# Altium PCB SB7043.PcbDoc (part 1 of 2)
Units mm, origin at the board's own origin, x right, y up, seen from the top; angles counter-clockwise.
Board outline 70 x 43 mm, 4 copper layers (Top Layer, GND, Signal Layer 1, Bottom Layer), stack 1.534 mm thick; 111 components, 152 nets, 554 pads, 320 vias.
Unrouted connection lines stored in the file: 5.
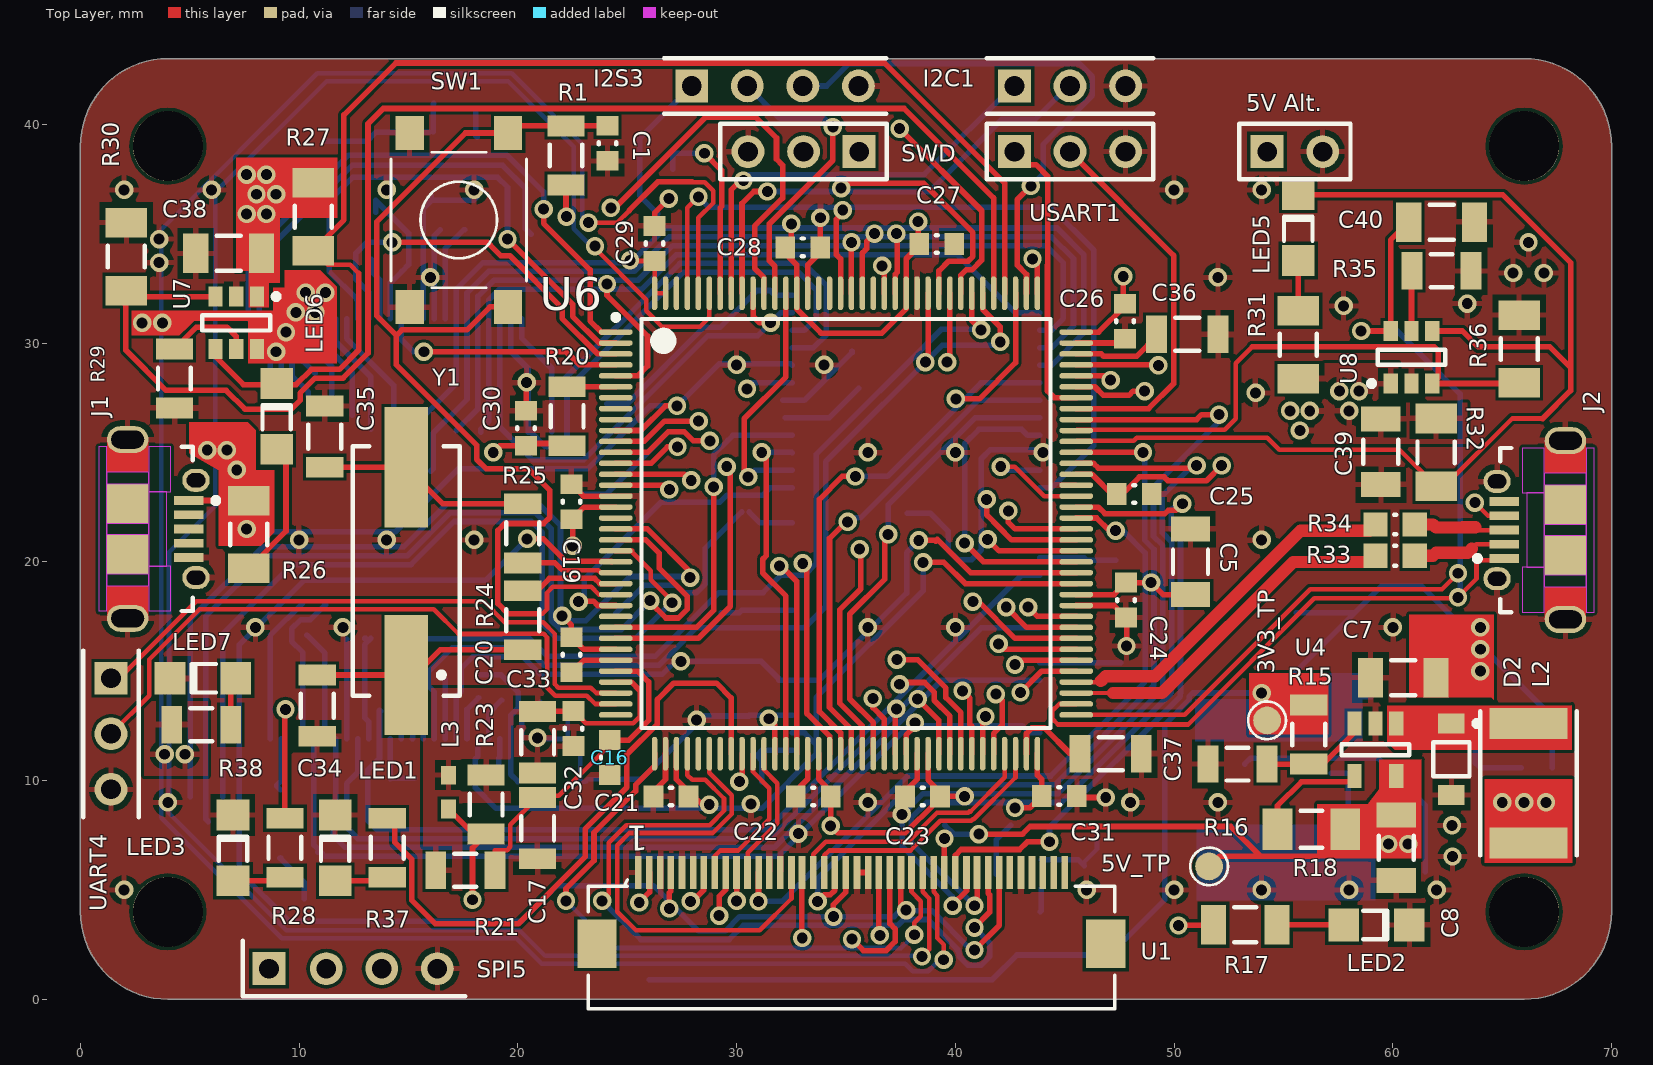
[diagram p0: Top Layer view]
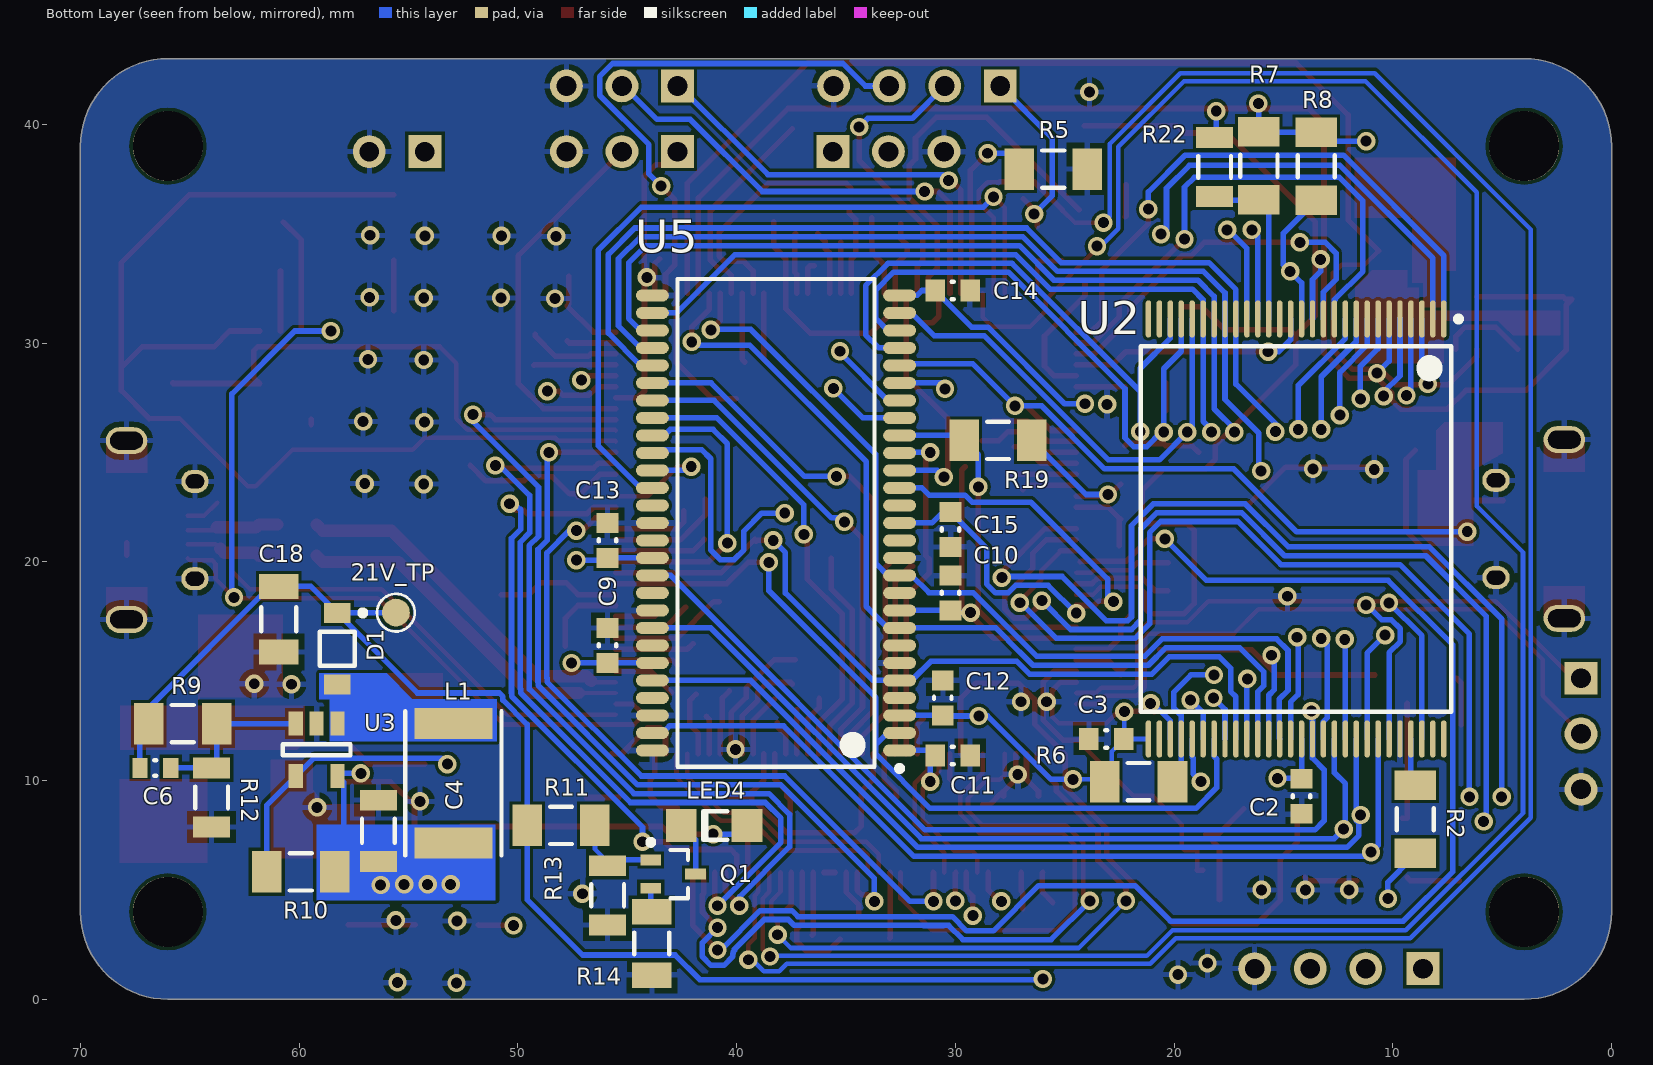
[diagram p1: Bottom Layer view, seen from below]
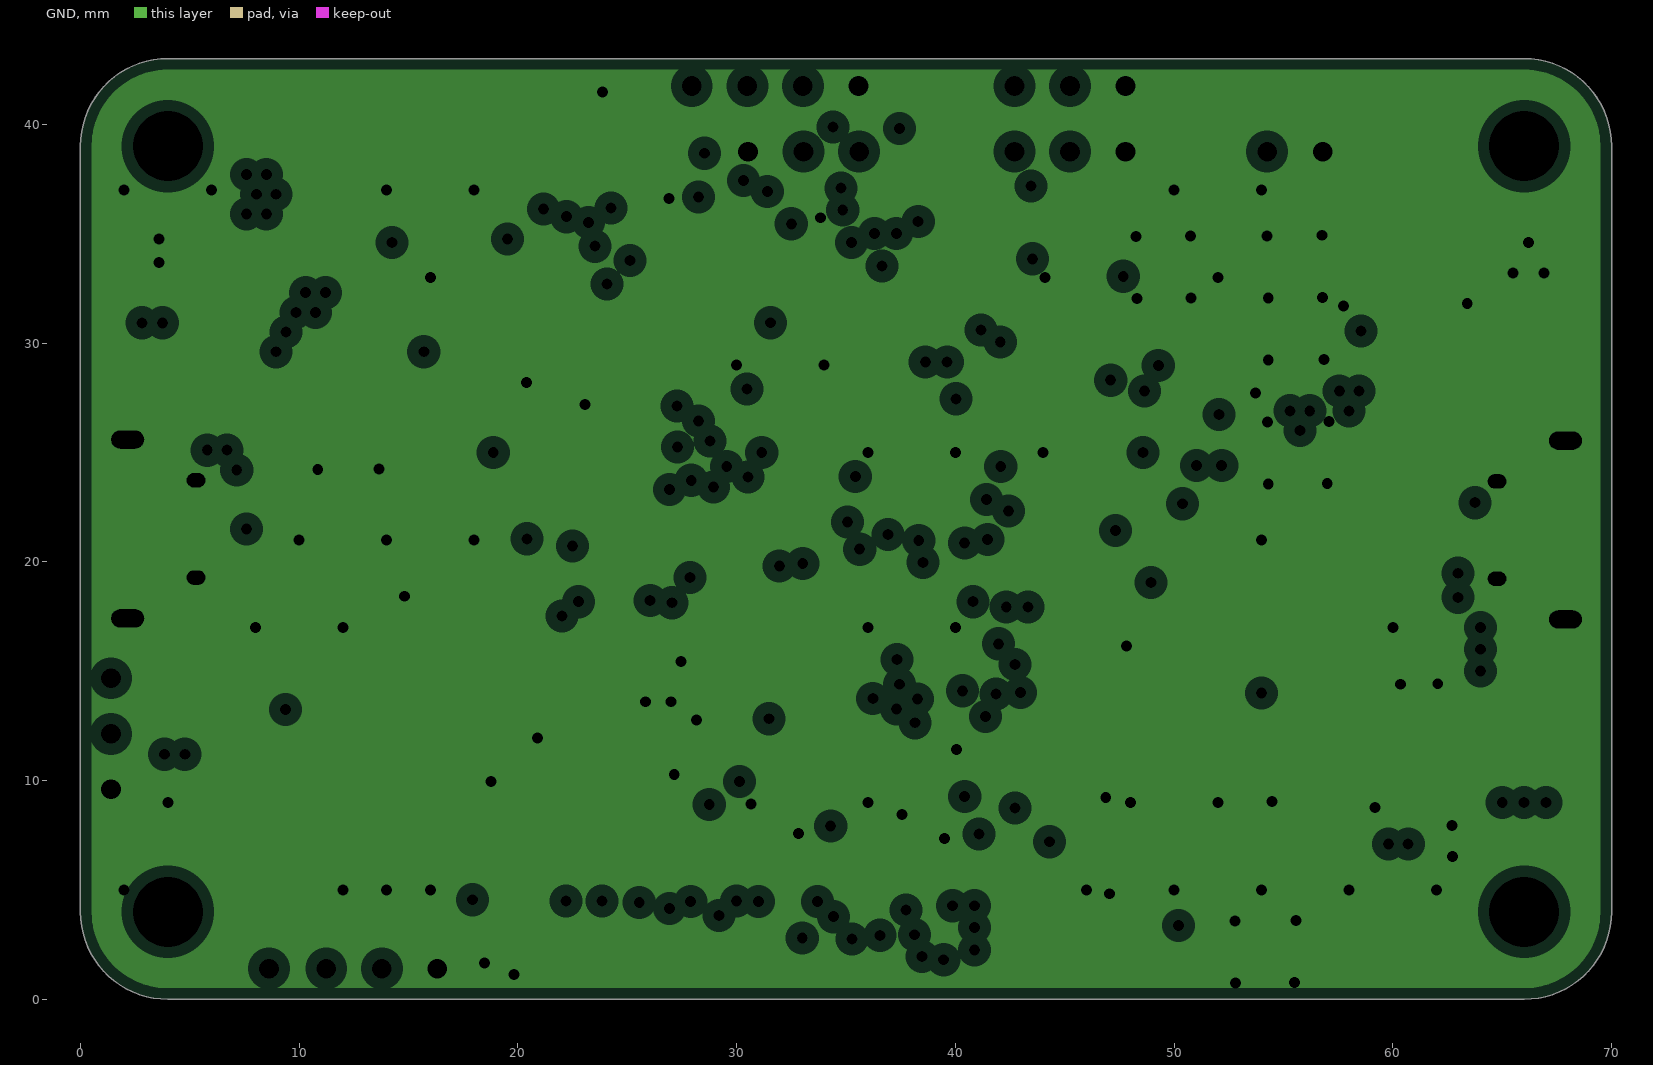
[diagram p2: GND, clearances drawn from the general rule]
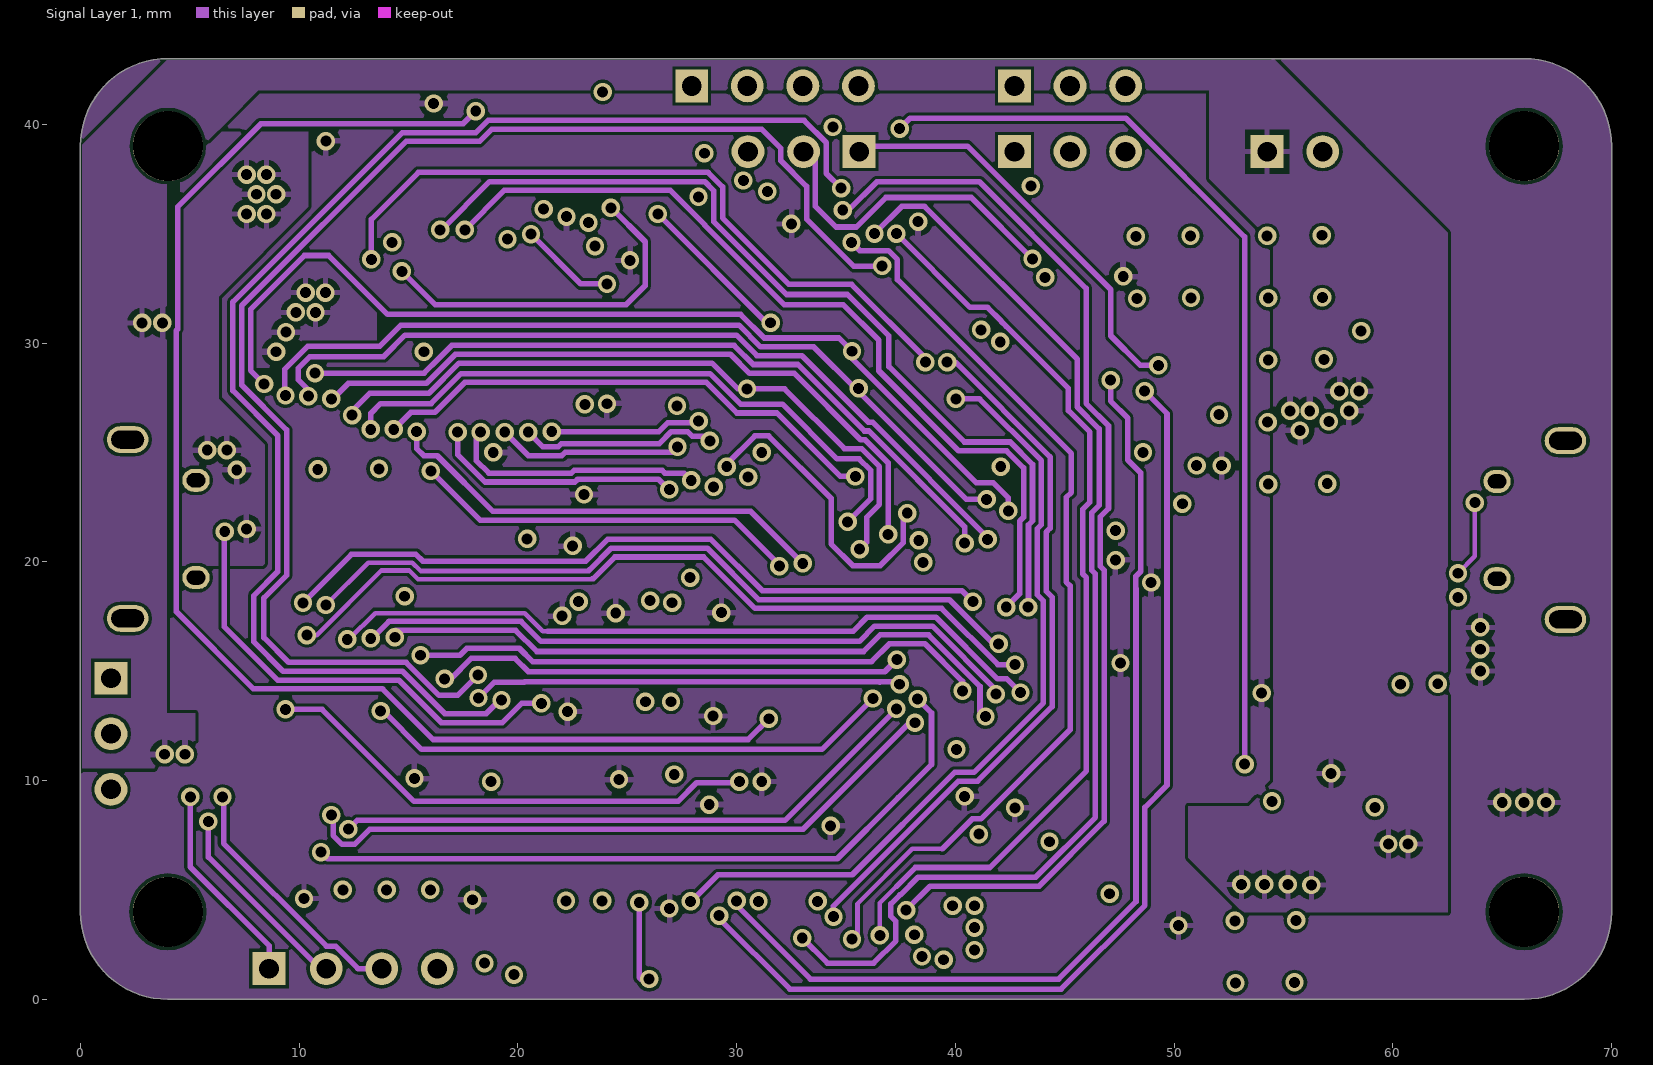
[diagram p3: Signal Layer 1]

## Layer stack, top to bottom
Top Solder: solder mask 0.0102, Solder Resist, Dk 3.5
Top Layer: signal copper 0.017
Dielectric1: prepreg 0.36, Dk 4.2
GND: plane copper 0.035
Dielectric 2: core 0.71, FR4, Dk 4.2
Signal Layer 1: signal copper 0.035
Dielectric 3: prepreg 0.36, Dk 4.2
Bottom Layer: signal copper 0.017
Bottom Solder: solder mask 0.0102, Solder Resist, Dk 3.5

## Board outline
4,0 cw(c4,4) 0,4 0,39 cw(c4,39) 4,43 66,43 cw(c66,39) 70,39 70,4 cw(c66,4) 66,0

## Design rules (kind name [scope] priority, off if disabled: settings)
Clearance [All] p1: gap=0.15
DiffPairsRouting [All] p1: maxlimit=6.863 minlimit=0.21 mostfreqgap=0.588 toplayer_minwidth=0.201 toplayer_maxwidth=0.667 toplayer_prefwidth=0.56 midlayer1_minwidth=0.201 midlayer1_maxwidth=0.667 midlayer1_prefwidth=0.56 bottomlayer_minwidth=0.201 bottomlayer_maxwidth=0.667 bottomlayer_prefwidth=0.56 maxuncoupledlength=12.7
MatchedLengths DiffPair_USBMatchedLengths [InDifferentialPair ('OTG')] p1: tolerance=25.4 checknetsindiffpair=TRUE checkdiffpairvsdiffpair=TRUE checkothers=TRUE
MaxMinImpedance [InNetClass('A[0..23]')] p1: minimum=40,00 maximum=60,00
MinimumSolderMaskSliver [All] p1: minsoldermaskwidth=0.21
PlaneClearance [All] p1: clearance=0.508
PlaneConnect [All] p1: planeconnectstyle=Relief reliefexpansion=0.508 reliefentries=4 reliefconductorwidth=0.254 reliefairgap=0.254
PolygonConnect [All] p1: connectstyle=Relief reliefconductorwidth=0.254 reliefentries=4 polygonreliefangle="90 Angle" airgapwidth=0.254
RoutingVias [All] p1: holewidth=0.5 width=0.84 viastyle="Through Hole" minholewidth=0.4 minwidth=0.74 maxholewidth=0.5 maxwidth=0.84
SolderMaskExpansion [All] p1: expansion=0.102
Width [All] p1: maxlimit=0.254 minlimit=0.21 preferedwidth=0.254
26 further rules are at their usual default settings.

## Classes and differential pairs
net class R[7..2]: R2 R3 R4 R5 R6 R7
component class IO_Peripherals: "5V Alt." C1 I2C1 I2S3 LED1 LED3 R1 R28 R37 SPI5 SW1 SWD U1 UART4 USART1
component class MCU: C5 C16 C17 C19 C20 C21 C22 C23 C24 C25 C26 C27 C28 C29 C30 C31 C32 C33 C34 C35 C36 C37 L3 R5 R20 R21 R22 R23 R24 R25 U6 Y1
component class NOR: C2 C3 R2 R6 R7 R8 U2
component class Power: 3V3_TP 5V_TP 21V_TP C4 C6 C7 C8 C18 D1 D2 L1 L2 LED2 LED4 Q1 R9 R10 R11 R12 R13 R14 R15 R16 R17 R18 U3 U4
component class RAM: C9 C10 C11 C12 C13 C14 C15 R19 U5
component class USB: C38 C39 C40 J1 J2 LED5 LED6 LED7 R26 R27 R29 R30 R31 R32 R33 R34 R35 R36 R38 U7 U8
net class A[0..23]: A0 A1 A2 A3 A4 A5 A6 A7 A8 A9 A10 A11 A12 A13 A14 A15 A16 A17 A18 A19 A20 A21 A22 A23
net class B[7..2]: B2 B3 B4 B5 B6 B7
net class DQ[0..15]: DQ0 DQ1 DQ2 DQ3 DQ4 DQ5 DQ6 DQ7 DQ8 DQ9 DQ10 DQ11 DQ12 DQ13 DQ14 DQ15
net class G[7..2]: G2 G3 G4 G5 G6 G7
differential pair OTGBIS: +OTGBIS_P -OTGBIS_N
differential pair OTG: +OTG_P -OTG_N

## Components (designator, comment, footprint, x,y, rotation, side; value= is the part's Value field where it differs from the comment)
3V3_TP "TESTPOINT" TP-R60 54.25,12.75 r90 top
"5V Alt." "Header 2" HDR1X2 54.25,38.75 r0 top
5V_TP "TESTPOINT" TP-R60 51.6,6.075 r90 top
21V_TP "TESTPOINT" TP-R60 55.575,17.675 r90 bottom
C1 "100nF" CAPC0603(1608)100_N 24.1,39.125 r90 top
C2 "100nF" CAPC0603(1608)100_N 14.175,9.275 r90 bottom
C3 "100nF" CAPC0603(1608)100_N 23.1,11.9 r180 bottom
C4 "2.2uF 16V" CAPC1206(3216)190_L 56.375,7.7 r270 bottom
C5 "4.7uF" CAPC1206(3216)190_N 50.75,20 r270 top
C6 "CAP 100pF 50V 0603(1608)" CAPC0603(1608)100_L 66.575,10.575 r0 bottom
C7 "CAP 22uF 16V 1206(3216)" CAPC1206(3216)190_N 60.475,14.7 r0 top
C8 "CAP 22uF 16V 1206(3216)" CAPC1206(3216)190_N 60.15,6.925 r90 top
C9 "100nF" CAPC0603(1608)100_N 45.9,16.175 r270 bottom
C10 "100nF" CAPC0603(1608)100_N 30.225,18.575 r270 bottom
C11 "100nF" CAPC0603(1608)100_N 30.125,11.15 r0 bottom
C12 "100nF" CAPC0603(1608)100_N 30.575,13.775 r270 bottom
C13 "100nF" CAPC0603(1608)100_N 45.9,20.975 r270 bottom
C14 "100nF" CAPC0603(1608)100_N 30.125,32.4 r0 bottom
C15 "100nF" CAPC0603(1608)100_N 30.225,21.475 r90 bottom
C16 "100nF" CAPC0603(1608)100_N 24.2,11.05 r90 top
C17 "1uF" CAPC1206(3216)170_L 20.9,7.825 r90 top
C18 "4.7uF" CAPC1206(3216)190_N 60.925,17.375 r90 bottom
C19 "100nF" CAPC0603(1608)100_N 22.45,22.75 r270 top
C20 "100nF" CAPC0603(1608)100_N 22.45,15.75 r90 top
C21 "100nF" CAPC0603(1608)100_N 27,9.275 r0 top
C22 "100nF" CAPC0603(1608)100_N 33.5,9.275 r0 top
C23 "100nF" CAPC0603(1608)100_N 38.5,9.275 r0 top
C24 "100nF" CAPC0603(1608)100_N 47.8,18.25 r90 top
C25 "100nF" CAPC0603(1608)100_N 48.175,23.1 r180 top
C26 "100nF" CAPC0603(1608)100_N 47.75,31 r90 top
C27 "100nF" CAPC0603(1608)100_N 39.15,34.525 r180 top
C28 "100nF" CAPC0603(1608)100_N 33.025,34.375 r180 top
C29 "100nF" CAPC0603(1608)100_N 26.25,34.55 r270 top
C30 "100nF" CAPC0603(1608)100_N 20.375,26.1 r270 top
C31 "100nF" CAPC0603(1608)100_N 44.75,9.3 r180 top
C32 "100nF" CAPC0603(1608)100_N 22.55,12.375 r90 top
C33 "1uF" CAPC1206(3216)170_L 20.9,11.75 r90 top
C34 "CAP 18pF 630V" CAPC1206(3216)170_L 10.825,13.425 r270 top
C35 "CAP 18pF 630V" CAPC1206(3216)170_L 11.175,25.725 r90 top
C36 "2.2uF 16V" CAPC1206(3216)190_L 50.6,30.4 r180 top
C37 "2.2uF 16V" CAPC1206(3216)190_L 47.1,11.225 r180 top
C38 "4.7uF" CAPC1206(3216)190_N 6.775,34.1 r0 top
C39 "4.7uF" CAPC1206(3216)190_N 59.45,25.025 r90 top
C40 "4.7uF" CAPC1206(3216)190_N 62.225,35.525 r180 top
D1 "MBR0530T1G" ONSC-SOD-123-2-425-04_V 58.25,16.025 r270 bottom
D2 "MBR230LSFT1G" ONSC-SOD-123FL-2-498-01_V 62.675,10.975 r270 top
I2C1 "Header 3" HDR1X3 42.7,41.75 r0 top
I2S3 "Header 4" HDR1X4#1 27.95,41.75 r0 top
J1 "ZX62D-AB-5P8" HIRO-ZX62D-AB-5P8_V 3.725,21.5 r270 top
J2 "ZX62D-AB-5P8" HIRO-ZX62D-AB-5P8_V 66.325,21.45 r90 top
L1 "22.0 µH" WE-PD4-S 52.95,9.875 r90 bottom
L2 "2.20 µH" WE-PD4-S 66.2,9.875 r270 top
L3 "Ferrite" SMD-0603 16.825,9.475 r90 top
LED1 "150120YS75000" 1206_A 11.65,6.925 r270 top
LED2 "150120GS75000" 1206_A 59.25,3.4 r180 top
LED3 "150120RS75000" 1206_A 6.975,6.925 r270 top
LED4 "150120BS75000" 1206_A 41.025,7.95 r180 bottom
LED5 "150120RS75000" 1206_A 55.675,35.275 r270 top
LED6 "150120RS75000" 1206_A 8.975,26.65 r270 top
LED7 "150120YS75000" 1206_A 5.6,14.675 r0 top
Q1 "BC847BW" INF-SOT323_N 42.9,5.725 r180 bottom
R1 "100K 1% 1206(3216)" RESC1206(3216)_L 22.2,38.575 r270 top
R2 "10K 5% 1206" RESC1206(3216)_M 8.975,8.225 r270 bottom
R5 "10K 5% 1206" RESC1206(3216)_M 25.525,37.95 r0 bottom
R6 "10K 5% 1206" RESC1206(3216)_M 21.625,9.95 r0 bottom
R7 "10K 5% 1206" RESC1206(3216)_M 16.125,38.1 r90 bottom
R8 "10K 5% 1206" RESC1206(3216)_M 13.5,38.075 r90 bottom
R9 "215K 1% 1206(3216)" RESC1206(3216)_M 65.325,12.6 r0 bottom
R10 "10K 5% 1206" RESC1206(3216)_M 59.925,5.825 r180 bottom
R11 "10K 5% 1206" RESC1206(3216)_M 48.025,7.95 r0 bottom
R12 "13K3 1% 1206(3216)" RESC1206(3216)_L 64,9.225 r90 bottom
R13 "3K32 1%" RESC1206(3216)_L 45.9,4.75 r90 bottom
R14 "86R6 1%" RESC1206(3216)_N 43.875,2.55 r90 bottom
R15 "45K3 1% 1206(3216)" RESC1206(3216)_L 56.15,12.1 r270 top
R16 "100K 1% 1206(3216)" RESC1206(3216)_L 52.9,10.75 r0 top
R17 "5R1 1% 1206(3216)" RESC1206(3216)_N 53.25,3.4 r180 top
R18 "10K 5% 1206" RESC1206(3216)_M 56.275,7.775 r0 top
R19 "10K 5% 1206" RESC1206(3216)_M 28.05,25.55 r180 bottom
R20 "Jumper 1206(3216)" RESC1206(3216)_L 22.25,26.65 r90 top
R21 "Jumper 1206(3216)" RESC1206(3216)_L 17.6,5.9 r180 top
R22 "Jumper 1206(3216)" RESC1206(3216)_L 18.15,38.05 r270 bottom
R23 "Jumper 1206(3216)" RESC1206(3216)_L 18.55,8.9 r90 top
R24 "402R 1% 1206(3216)" RESC1206(3216)_L 20.225,17.325 r270 top
R25 "Jumper 1206(3216)" RESC1206(3216)_L 20.225,21.3 r90 top
R26 "330R 5% 1206(3216)" RESC1206(3216)_M 7.7,21.25 r90 top
R27 "10K 5% 1206" RESC1206(3216)_M 10.65,35.775 r90 top
R28 "130R 5% 1206(3216)" RESC1206(3216)_L 9.35,6.925 r90 top
R29 "18K7 1%" RESC1206(3216)_L 4.3,28.375 r90 top
R30 "10K 5% 1206" RESC1206(3216)_M 2.1,33.95 r270 top
R31 "330R 5% 1206(3216)" RESC1206(3216)_M 55.675,29.925 r270 top
R32 "10K 5% 1206" RESC1206(3216)_M 61.975,25 r90 top
R33 "22R 1%" RESC0603(1608)_M 60.1,20.275 r0 top
R34 "22R 1%" RESC0603(1608)_M 60.1,21.7 r0 top
R35 "18K7 1%" RESC1206(3216)_L 62.225,33.3 r180 top
R36 "10K 5% 1206" RESC1206(3216)_M 65.775,29.725 r270 top
R37 "130R 5% 1206(3216)" RESC1206(3216)_L 14.025,6.925 r90 top
R38 "130R 5% 1206(3216)" RESC1206(3216)_L 5.525,12.55 r180 top
SPI5 "Header 4" HDR1X4#2 8.7,1.4 r0 top
SW1 "430182043816" 430182043816 17.3,35.625 r270 top
SWD "Header 3" HDR1X3 35.6,38.75 r180 top
U1 "SOCKET FFC/FPC, ZIF, 0.5MM, 40WAY" HIROSE_FH12S-40S-0.5SH(55) 35.25,9.225 r180 top
U2 "S29GL256P" 56-Pin_Standard_TSOP 14.425,21.5 r270 bottom
U3 "LM27313XMF/NOPB" DBV0005A 59.2,11.4 r270 bottom
U4 "LMR10510XMFE/NOPB" DBV0005A 59.2,11.4 r270 top
U5 "MT48LC32M8A2P-7E" MICT-P-54_N 38.2,21.775 r0 bottom
U6 "STM32F429ZIT6" STM-LQFP144_L 35,21.75 r0 top
U7 "TPS2552DBVT" DBV6_L 7.125,30.925 r270 top
U8 "TPS2552DBVT" DBV6_L 60.85,29.35 r90 top
UART4 "Header 3" HDR1X3 1.4,14.675 r270 top
USART1 "Header 3" HDR1X3 42.7,38.75 r0 top
Y1 "HC49/4H_SMX" HC49/4H_SMX 14.9,19.575 r90 top

## Footprints (in the part's own frame and the unit in brackets; to place one, negate y for a bottom-side part, rotate by r counter-clockwise, add the part's x,y. Pads: shape width x height; smd on the part's side, far side on the other; paste and mask are expansions set on the pad)
56-Pin_Standard_TSOP [mm] "SOP, 56-Leads, Body 18.6x14.2mm, Pitch 0.5mm, IPC Medium Density"
  oval 1.7x0.25 smd: 1(-9.6,6.75) 2(-9.6,6.25) 3(-9.6,5.75) 4(-9.6,5.25) 5(-9.6,4.75) 6(-9.6,4.25) 7(-9.6,3.75) 8(-9.6,3.25) 9(-9.6,2.75) 10(-9.6,2.25) 11(-9.6,1.75) 12(-9.6,1.25) 13(-9.6,0.75) 14(-9.6,0.25) 15(-9.6,-0.25) 16(-9.6,-0.75) 17(-9.6,-1.25) 18(-9.6,-1.75) 19(-9.6,-2.25) 20(-9.6,-2.75) 21(-9.6,-3.25) 22(-9.6,-3.75) 23(-9.6,-4.25) 24(-9.6,-4.75) 25(-9.6,-5.25) 26(-9.6,-5.75) 27(-9.6,-6.25) 28(-9.6,-6.75) 29(9.6,-6.75) 30(9.6,-6.25) 31(9.6,-5.75) 32(9.6,-5.25) 33(9.6,-4.75) 34(9.6,-4.25) 35(9.6,-3.75) 36(9.6,-3.25) 37(9.6,-2.75) 38(9.6,-2.25) 39(9.6,-1.75) 40(9.6,-1.25) 41(9.6,-0.75) 42(9.6,-0.25) 43(9.6,0.25) 44(9.6,0.75) 45(9.6,1.25) 46(9.6,1.75) 47(9.6,2.25) 48(9.6,2.75) 49(9.6,3.25) 50(9.6,3.75) 51(9.6,4.25) 52(9.6,4.75) 53(9.6,5.25) 54(9.6,5.75) 55(9.6,6.25) 56(9.6,6.75)
  silkscreen extent -9.72,-7.1 8.35,7.55, body extent -9.3,-7.1 9.3,7.1, height 1.2
1206_A [mm] "Chip LED, 2-Leads, Body 3.2x1.6mm, IPC Medium Density"
  rect 1.4x1.5 smd: 1(-1.5,0) 2(1.5,0)
  silkscreen extent -0.5,-0.66 0.6,0.65, body extent -1.6,-0.8 1.6,0.8, height 0.68
430182043816 [mm] "6*6mm vertical type, SMD, height 4.3mm, black actuator, 160gf, T&R"
  rect 1.55x1.3 smd: 1(-3.975,2.25) 2(-3.975,-2.25) 3(3.975,2.25) 4(3.975,-2.25)
  silkscreen extent -3.1,-3.1 3.1,3.1, body extent -4.5,-3.1 4.5,3.1, height 4.29
CAPC0603(1608)100_L [mm] "Chip Capacitor, Body 1.6x0.8mm, Height 1.0mm, IPC High Density"
  rect 0.7x0.9 smd: 1(-0.7,0) 2(0.7,0)
  silkscreen extent -0.05,-0.35 0.05,0.35, body extent -0.87,-0.47 0.88,0.48, height 1
CAPC0603(1608)100_N [mm] "Chip Capacitor, Body 1.6x0.8mm, Height 1.0mm, IPC Medium Density"
  rect 0.9x1 smd: 1(-0.8,0) 2(0.8,0)
  silkscreen extent -0.05,-0.4 0.05,0.4, body extent -0.87,-0.48 0.88,0.47, height 1
CAPC1206(3216)170_L [mm] "Chip Capacitor, Body 3.2x1.6mm, Height 1.7mm, IPC High Density"
  rect 0.95x1.7 smd: 1(-1.4,0) 2(1.4,0)
  silkscreen extent -0.55,-0.75 0.55,0.75, body extent -1.7,-0.9 1.7,0.9, height 1.7
CAPC1206(3216)190_L [mm] "Chip Capacitor, Body 3.2x1.6mm, Height 1.9mm, IPC High Density"
  rect 0.95x1.7 smd: 1(-1.4,0) 2(1.4,0)
  silkscreen extent -0.55,-0.75 0.55,0.75, body extent -1.7,-0.9 1.7,0.9, height 1.9
CAPC1206(3216)190_N [mm] "Chip Capacitor, Body 3.2x1.6mm, Height 1.9mm, IPC Medium Density"
  rect 1.15x1.8 smd: 1(-1.5,0) 2(1.5,0)
  silkscreen extent -0.55,-0.8 0.55,0.8, body extent -1.7,-0.9 1.7,0.9, height 1.9
DBV0005A [mm]
  rect 1.1x0.65 smd paste-0.102 mask+0.051: 1(-1.2,0.95) 2(-1.2,0) 3(-1.2,-0.95) 4(1.2,-0.95) 5(1.2,0.95)
  silkscreen extent -0.25,-1.55 0.25,1.55
DBV6_L [mm] "SOT23, 6-Leads, Body 2.9x1.6mm, Pitch 0.95mm, Lead Span 2.8mm, IPC High Density"
  rect 0.9x0.65 smd: 1(-1.2,0.95) 2(-1.2,0) 3(-1.2,-0.95) 4(1.2,-0.95) 5(1.2,0) 6(1.2,0.95)
  silkscreen extent -1.32,-1.55 0.35,1.95, body extent -0.87,-1.52 0.87,1.53, height 1.45
HC49/4H_SMX [mm] "Surface Mount Quartz Crystal; Body 13.4 (inc. leads) x 4.9 mm (LxW max)"
  rect 5.5x2 smd: 1(-4.75,0) 2(4.75,0)
  silkscreen extent -5.7,-2.45 5.7,2.45
HDR1X2 [mm] "Connector; Header; 2 Position"
  rect 1.5x1.5 hole 0.9: 1(0,0)
  round 1.5 hole 0.9: 2(2.54,0)
  silkscreen extent -1.27,-1.27 3.81,1.27
HDR1X3 [mm] "Connector; Header; 3 Position"
  rect 1.5x1.5 hole 0.9: 1(0,0)
  round 1.5 hole 0.9: 2(2.54,0) 3(5.08,0)
  silkscreen extent -1.27,-1.27 6.35,1.27
HDR1X4#1 [mm] "Connector; Header; 4 Position"
  rect 1.5x1.5 hole 0.9: 1(0,0)
  round 1.5 hole 0.9: 2(2.54,0) 3(5.08,0) 4(7.62,0)
  silkscreen extent -1.27,-1.27 8.89,1.27
HDR1X4#2 [mm] "Connector; Header; 4 Position"
  rect 1.5x1.5 hole 0.9: 1(-0.075,0)
  round 1.5 hole 0.9: 2(2.54,0) 3(5.08,0) 4(7.62,0)
  silkscreen extent -1.27,-1.27 8.89,1.27
HIRO-ZX62D-AB-5P8_V [mm] "USB Micro-AB Connector, 5-Leads, Pitch 0.65mm"
  rect 0.4x1.35 smd: 1(-1.3,1.238) 2(-0.65,1.238) 3(0,1.238) 4(0.65,1.238) 5(1.3,1.238)
  oval 1.05x1.25 hole 0.65 slot 0.85 at 90 deg: 6(2.225,1.563) 11(-2.225,1.563)
  oval 1.225x1.9 hole 0.825 slot 1.5 at 90 deg: 7(4.088,-1.562) 10(-4.088,-1.562)
  rect 1.8x1.9 smd: 8(1.15,-1.562) 9(-1.15,-1.562)
  Top Layer region: 2.6,-2.512 4.088,-2.512 4.088,-0.612 2.6,-0.612
  Top Layer region: -4.088,-2.513 -2.6,-2.513 -2.6,-0.613 -4.088,-0.613
  Top Layer keep-out region: -3.75,-0.602 -1.7,-0.602 -1.7,0.413 -3.75,0.413
  Top Layer keep-out region: -1.7,-0.603 1.7,-0.603 1.7,0.213 -1.7,0.213
  Top Layer keep-out region: 1.7,-0.603 3.75,-0.603 3.75,0.413 1.7,0.413
  Top Layer keep-out region: -3.75,-2.887 3.75,-2.887 3.75,-2.523 -3.75,-2.523
  Top Layer keep-out region: -2.59,-2.522 -2.06,-2.522 -2.06,-0.602 -2.59,-0.602
  Top Layer keep-out region: -0.24,-2.522 0.24,-2.522 0.24,-0.602 -0.24,-0.602
  Top Layer keep-out region: 2.59,-0.602 2.06,-0.602 2.06,-2.522 2.59,-2.522
  silkscreen extent -3.75,0.91 3.75,2.59, body extent -4.37,-4.19 4.37,1.86, height 2.83
HIROSE_FH12S-40S-0.5SH(55) [mil]
  rect 12x59 smd: 1(384,135) 2(364,135) 3(344,135) 4(325,135) 5(305,135) 6(285,135) 7(266,135) 8(246,135) 9(226,135) 10(207,135) 11(187,135) 12(167,135) 13(148,135) 14(128,135) 15(108,135) 16(89,135) 17(69,135) 18(49,135) 19(30,135) 20(10,135) 21(-10,135) 22(-30,135) 23(-49,135) 24(-69,135) 25(-89,135) 26(-108,135) 27(-128,135) 28(-148,135) 29(-167,135) 30(-187,135) 31(-207,135) 32(-226,135) 33(-246,135) 34(-266,135) 35(-285,135) 36(-305,135) 37(-325,135) 38(-344,135) 39(-364,135) 40(-384,135)
  rect 71x87 smd: 41(-458,263) 42(458,263)
  silkscreen extent -474,148 474,380
INF-SOT323_N [mm] "SOT23, 3-Leads, Body 2x1.25 mm, Pitch 0.65 mm, IPC Medium Density"
  rect 0.95x0.5 smd: 1(-1.025,0.65) 2(-1.025,-0.65) 3(1.025,0)
  silkscreen extent -1.15,-1.1 0.67,1.57, body extent -0.67,-1.1 0.67,1.1, height 1
MICT-P-54_N [mm] "SOP, 54-Leads, Body 22.22x10.16mm, Pitch 0.8mm, IPC Medium Density"
  oval 1.5x0.55 smd: 1(-5.65,10.4) 2(-5.65,9.6) 3(-5.65,8.8) 4(-5.65,8) 5(-5.65,7.2) 6(-5.65,6.4) 7(-5.65,5.6) 8(-5.65,4.8) 9(-5.65,4) 10(-5.65,3.2) 11(-5.65,2.4) 12(-5.65,1.6) 13(-5.65,0.8) 14(-5.65,0) 15(-5.65,-0.8) 16(-5.65,-1.6) 17(-5.65,-2.4) 18(-5.65,-3.2) 19(-5.65,-4) 20(-5.65,-4.8) 21(-5.65,-5.6) 22(-5.65,-6.4) 23(-5.65,-7.2) 24(-5.65,-8) 25(-5.65,-8.8) 26(-5.65,-9.6) 27(-5.65,-10.4) 28(5.65,-10.4) 29(5.65,-9.6) 30(5.65,-8.8) 31(5.65,-8) 32(5.65,-7.2) 33(5.65,-6.4) 34(5.65,-5.6) 35(5.65,-4.8) 36(5.65,-4) 37(5.65,-3.2) 38(5.65,-2.4) 39(5.65,-1.6) 40(5.65,-0.8) 41(5.65,0) 42(5.65,0.8) 43(5.65,1.6) 44(5.65,2.4) 45(5.65,3.2) 46(5.65,4) 47(5.65,4.8) 48(5.65,5.6) 49(5.65,6.4) 50(5.65,7.2) 51(5.65,8) 52(5.65,8.8) 53(5.65,9.6) 54(5.65,10.4)
  silkscreen extent -5.77,-11.15 4.5,11.35, body extent -5.1,-11.15 5.1,11.15, height 0.05
ONSC-SOD-123-2-425-04_V [mm] "SOD, 2-Leads, Body 2.69x1.6mm"
  rect 0.91x1.22 smd: 1(-1.635,0) 2(1.635,0)
  silkscreen extent -1.76,-0.8 0.78,1.28, body extent -1.35,-0.8 1.35,0.8, height 1.35
ONSC-SOD-123FL-2-498-01_V [mm] "SOD, 2-Leads, Body 2.7x1.65mm"
  rect 0.91x1.22 smd: 1(-1.635,0) 2(1.635,0)
  silkscreen extent -1.76,-0.82 0.78,1.29, body extent -1.35,-0.82 1.35,0.82, height 1
RESC0603(1608)_M [mm] "Chip Resistor, Body 1.6x0.8mm, IPC Low Density"
  rect 1.1x1.1 smd: 1(-0.9,0) 2(0.9,0)
  silkscreen extent -0.05,-0.45 0.05,0.45, body extent -0.85,-0.47 0.85,0.47, height 0.6
RESC1206(3216)_L [mm] "Chip Resistor, Body 3.2x1.6mm, IPC High Density"
  rect 0.95x1.7 smd: 1(-1.35,0) 2(1.35,0)
  silkscreen extent -0.5,-0.75 0.5,0.75, body extent -1.67,-0.87 1.67,0.87, height 0.75
RESC1206(3216)_M [mm] "Chip Resistor, Body 3.2x1.6mm, IPC Low Density"
  rect 1.35x1.9 smd: 1(-1.55,0) 2(1.55,0)
  silkscreen extent -0.5,-0.85 0.5,0.85, body extent -1.67,-0.87 1.67,0.87, height 0.75
RESC1206(3216)_N [mm] "Chip Resistor, Body 3.2x1.6mm, IPC Medium Density"
  rect 1.15x1.8 smd: 1(-1.45,0) 2(1.45,0)
  silkscreen extent -0.5,-0.8 0.5,0.8, body extent -1.67,-0.87 1.67,0.87, height 0.75
SMD-0603 [mm] "Chip Inductor, 2-Leads, Body 1.6x0.8mm"
  rect 0.85x0.7 smd: 1(-0.775,0) 2(0.775,0)
  body extent -0.8,-0.4 0.8,0.4, height 0.79
STM-LQFP144_L [mm] "Thin QFP, 144-Leads, Body 20x20mm, Pitch 0.5mm, IPC High Density"
  oval 1.55x0.25 smd: 1(-10.525,8.75) 2(-10.525,8.25) 3(-10.525,7.75) 4(-10.525,7.25) 5(-10.525,6.75) 6(-10.525,6.25) 7(-10.525,5.75) 8(-10.525,5.25) 9(-10.525,4.75) 10(-10.525,4.25) 11(-10.525,3.75) 12(-10.525,3.25) 13(-10.525,2.75) 14(-10.525,2.25) 15(-10.525,1.75) 16(-10.525,1.25) 17(-10.525,0.75) 18(-10.525,0.25) 19(-10.525,-0.25) 20(-10.525,-0.75) 21(-10.525,-1.25) 22(-10.525,-1.75) 23(-10.525,-2.25) 24(-10.525,-2.75) 25(-10.525,-3.25) 26(-10.525,-3.75) 27(-10.525,-4.25) 28(-10.525,-4.75) 29(-10.525,-5.25) 30(-10.525,-5.75) 31(-10.525,-6.25) 32(-10.525,-6.75) 33(-10.525,-7.25) 34(-10.525,-7.75) 35(-10.525,-8.25) 36(-10.525,-8.75) 73(10.525,-8.75) 74(10.525,-8.25) 75(10.525,-7.75) 76(10.525,-7.25) 77(10.525,-6.75) 78(10.525,-6.25) 79(10.525,-5.75) 80(10.525,-5.25) 81(10.525,-4.75) 82(10.525,-4.25) 83(10.525,-3.75) 84(10.525,-3.25) 85(10.525,-2.75) 86(10.525,-2.25) 87(10.525,-1.75) 88(10.525,-1.25) 89(10.525,-0.75) 90(10.525,-0.25) 91(10.525,0.25) 92(10.525,0.75) 93(10.525,1.25) 94(10.525,1.75) 95(10.525,2.25) 96(10.525,2.75) 97(10.525,3.25) 98(10.525,3.75) 99(10.525,4.25) 100(10.525,4.75) 101(10.525,5.25) 102(10.525,5.75) 103(10.525,6.25) 104(10.525,6.75) 105(10.525,7.25) 106(10.525,7.75) 107(10.525,8.25) 108(10.525,8.75)
  oval 0.25x1.55 smd: 37(-8.75,-10.525) 38(-8.25,-10.525) 39(-7.75,-10.525) 40(-7.25,-10.525) 41(-6.75,-10.525) 42(-6.25,-10.525) 43(-5.75,-10.525) 44(-5.25,-10.525) 45(-4.75,-10.525) 46(-4.25,-10.525) 47(-3.75,-10.525) 48(-3.25,-10.525) 49(-2.75,-10.525) 50(-2.25,-10.525) 51(-1.75,-10.525) 52(-1.25,-10.525) 53(-0.75,-10.525) 54(-0.25,-10.525) 55(0.25,-10.525) 56(0.75,-10.525) 57(1.25,-10.525) 58(1.75,-10.525) 59(2.25,-10.525) 60(2.75,-10.525) 61(3.25,-10.525) 62(3.75,-10.525) 63(4.25,-10.525) 64(4.75,-10.525) 65(5.25,-10.525) 66(5.75,-10.525) 67(6.25,-10.525) 68(6.75,-10.525) 69(7.25,-10.525) 70(7.75,-10.525) 71(8.25,-10.525) 72(8.75,-10.525) 109(8.75,10.525) 110(8.25,10.525) 111(7.75,10.525) 112(7.25,10.525) 113(6.75,10.525) 114(6.25,10.525) 115(5.75,10.525) 116(5.25,10.525) 117(4.75,10.525) 118(4.25,10.525) 119(3.75,10.525) 120(3.25,10.525) 121(2.75,10.525) 122(2.25,10.525) 123(1.75,10.525) 124(1.25,10.525) 125(0.75,10.525) 126(0.25,10.525) 127(-0.25,10.525) 128(-0.75,10.525) 129(-1.25,10.525) 130(-1.75,10.525) 131(-2.25,10.525) 132(-2.75,10.525) 133(-3.25,10.525) 134(-3.75,10.525) 135(-4.25,10.525) 136(-4.75,10.525) 137(-5.25,10.525) 138(-5.75,10.525) 139(-6.25,10.525) 140(-6.75,10.525) 141(-7.25,10.525) 142(-7.75,10.525) 143(-8.25,10.525) 144(-8.75,10.525)
  silkscreen extent -10.65,-9.35 9.35,9.55, body extent -10,-10 10,10, height 1.6
TP-R60 [mm]
  round 1.27 smd paste-1.27: 1(0,0)
  silkscreen extent -0.86,-0.86 0.86,0.86, body extent -0.76,-0.76 0.76,0.76, height 0.25
WE-PD4-S [mm] "SMD Inductor, 2-Leads, Body 6.6 x 4.4 mm"
  rect 1.4x3.56 smd: 1(-2.73,0) 2(2.73,0)
  silkscreen extent -3.3,-2.2 3.3,2.2, body extent -3.3,-2.23 3.3,2.22, height 2.91

## Part data
3V3_TP 5V_TP 21V_TP: "SMD test pin"
"5V Alt.": "Header, 2-Pin"
C1 C2 C3 C9 C10 C11 C12 C13 C14 C15 C16 C19 C20 C21 C22 C23 C24 C25 C26 C27 C28 C29 C30 C31 C32: library part CMP-1035-02592-1, "CAP 100nF 50V ±10% 0603 (1608 Metric) Thickness 1mm SMD"
C4 C36 C37: library part CMP-1037-04816-1, "CAP 2.2uF 16V ±20% 1206 (3216 Metric) Thickness 1.9mm SMD"
C5 C18 C38 C39 C40: library part CMP-1037-04923-1, "CAP 4.7uF 50V ±10% 1206 (3216 Metric) Thickness 1.9mm SMD"
C6: library part CMP-1035-01270-1, "CAP 100pF 50V ±10% 0603 (1608 Metric) Thickness 1mm SMD"
C7 C8: library part CMP-1037-04992-1, "CAP 22uF 16V ±10% 1206 (3216 Metric) Thickness 1.9mm SMD"
C17 C33: library part CMP-1037-04687-1, "CAP 1uF 16V ±10% 1206 (3216 Metric) Thickness 1.7mm SMD"
C34 C35: library part CMP-1037-00919-1, "CAP 18pF 500V ±5% 1206 (3216 Metric) Thickness 1.7mm SMD"
D1: library part CMP-1055-00413-1, "Schottky Power Rectifier, 2-Pin SOD-123, Pb-Free, Tape and Reel"
D2: library part CMP-1055-00442-1, "Schottky Power Rectifier, 2-Pin SOD-123, Pb-Free, Tape and Reel"
I2C1 SWD UART4 USART1: "Header, 3-Pin"
I2S3 SPI5: "Header, 4-Pin"
J1 J2: library part CMP-1349-00001-1, "USB 2.0 Standard Micro-USB Connector, Micro AB-Standard (Bottom Mount), 30 V AC, -30 to 85 degC, Right Angle, 5-Pin 7.5 x 5.6 x 2.8 mm SMD, RoHS, Reel"
L1: library part CMP-0227-00739-1, "SMD-Power Inductor WE-PD4, L = 22.0 µH"
L2: library part CMP-0227-00671-1, "SMD-Power Inductor WE-PD4, L = 2.20 µH"
L3: library part CMP-0220-00181-1, "SMD EMI Suppression Ferrite Bead WE-CBF, Z = 600 Ohm"
LED1 LED7: library part CMP-1426-00019-1, "SMD mono-color Chip LED, WL-SMCW, Yellow"
LED2: library part CMP-1426-00014-1, "SMD mono-color Chip LED, WL-SMCW, Green"
LED3 LED5 LED6: library part CMP-1426-00013-1, "SMD mono-color Chip LED, WL-SMCW, Red"
LED4: library part CMP-1426-00015-1, "SMD mono-color Chip LED, WL-SMCW, Blue"
Q1: library part CMP-1177-00080-1, "NPN Silicon AF Transistor, 45 V VCEO, 100 mA IC, SOT323, Reel, Green"
R1 R16: library part CMP-1014-00736-1, "100K 0.25W 1% 1206 (3216 Metric)  SMD"
R2 R5 R6 R7 R8 R10 R11 R18 R19 R27 R30 R32 R36: library part CMP-1014-00098-1, "10K 0.25W 5% 1206 (3216 Metric)  SMD"
R9: library part CMP-1014-00771-1, "215K 0.25W 1% 1206 (3216 Metric)  SMD"
R12: library part CMP-1014-00636-1, "13K3 0.25W 1% 1206 (3216 Metric)  SMD"
R13: library part CMP-1014-00568-1, "3K32 0.25W 1% 1206 (3216 Metric)  SMD"
R14: library part CMP-1014-00390-1, "86R6 0.25W 1% 1206 (3216 Metric)  SMD"
R15: library part CMP-1014-00697-1, "45K3 0.25W 1% 1206 (3216 Metric)  SMD"
R17: library part CMP-1014-00251-1, "5R1 0.25W 1% 1206 (3216 Metric)  SMD"
R20 R21 R22 R23 R25: library part CMP-1014-00001-1, "Jumper 1206 (3216 Metric)"
R24: library part CMP-1014-00465-1, "402R 0.25W 1% 1206 (3216 Metric)  SMD"
R26 R31: library part CMP-1014-00062-1, "330R 0.25W 5% 1206 (3216 Metric)  SMD"
R28 R37 R38: library part CMP-1014-00053-1, "130R 0.25W 5% 1206 (3216 Metric)  SMD"
R29 R35: library part CMP-1014-00652-1, "18K7 0.25W 1% 1206 (3216 Metric)  SMD"
R33 R34: library part CMP-1012-00320-1, "22R 0.1W 1% 0603 (1608 Metric)  SMD"
SW1: library part CMP-1452-00013-1, "WS-TASV SMD Tact Switch 6X6 mm"
U1: library part FH12S-40S-0.5SH(55)
U3 U4: "Imported"
U5: library part CMP-0351-00096-1, "256Mb PC133 SDR SDRAM, 32Mb x 8, 7.5ns, 3.3V, 0 to 70 degC, 54-Pin TSOP, Pb-Free"
U6: library part CMP-0243-00051-2, "ARM Cortex-M4 32-bit MCU+FPU, 225 DMIPS, 2048 kB Flash, 256 kB Internal RAM, 114 I/Os, 144-pin LQFP, -40 to 85 degC, Tray"
U7 U8: library part CMP-0337-00290-1, "Adjustable, Active Low, Constant-Current, Current-Limited Power-Distribution Switch, 0.075 to 1.7 A Current Limit, -40 to 85 degC, 6-pin SOT-23 (DBV), Green (RoHS & no Sb/Br)"
Y1: "Surface Mount Quartz Crystal"

## Free pads (board coordinates)
  round 3.2 hole 3.2 unplated: 5(4,4) 8(4,39) 9(66,39) 12(66,4)

## Via types
v1: diameter 0.84, hole 0.5, Top Layer to Signal Layer 1, 104 vias
v2: diameter 0.84, hole 0.5, Signal Layer 1 to Bottom Layer, 66 vias
v3: diameter 0.84, hole 0.5, Top Layer to Bottom Layer, 57 vias
v4: diameter 0.84, hole 0.5, Top Layer to GND, 54 vias
v5: diameter 0.84, hole 0.5, GND to Bottom Layer, 39 vias

## Nets (pads, with @x,y where several pads share a name; then routed paths per layer and width w, separated by ;. In a path a pad name is that pad's centre, name@x,y a point inside that pad or via, vN(x,y) a via of type N, cw(c..) or ccw(c..) an arc to the next point about the centre after c; other vN are vias at no path point)
3V3: 3V3_TP.1 C2.2 C3.2 C5.2 C7.2 C9.2 C10.2 C11.2 C12.2 C13.2 C14.2 C15.2 C19.2 C20.2 C21.2 C22.2 C23.2 C24.2 C25.2 C26.2 C27.2 C28.2 C29.2 C30.2 C31.2 L2.2 L3.1 R1.2 R2.2 R6.2 R7.2 R8.2 R15.1 R17.2 R19.2 R20.1 R23.1 U1.4 U2.29 U2.43 U5.1 U5.3 U5.9 U5.14 U5.27 U5.43 U5.49 U6.17 U6.30 U6.39 U6.52 U6.62 U6.72 U6.84 U6.95 U6.108 U6.121 U6.131 U6.143 U6.144 | length 141.8
  Top Layer w0.21: v1(25.125,33.775) 25.15,33.75 C29.2@26.25,33.75 U6.144@26.25,32.275 U6.143@26.75,32.275
  Top Layer w0.254: L3.1@16.825,8.7 17.975,7.55 R23.1@18.55,7.55 17.925,6.925 v1(17.925,4.55) ; v1(18.875,25) 19.175,25.3 C30.2@20.375,25.3 ; C30.2@20.482,25.407 22.143,25.407 R20.1@22.25,25.3 ; v1(22.025,17.525) 22.45,17.1 C20.2@22.45,16.55 23,16 U6.30@24.475,16 ; R1.2@22.2,37.225 22.2,35.8 v1(22.225,35.775) ; v1(22.501,20.726) 22.501,21.899 C19.2@22.45,21.95 22.475,21.95 23.025,22.5 U6.17@24.475,22.5 ; v1(26.925,4.15) 26.925,4.875 26.995,4.945 U1.4@26.995,5.796 ; U6.39@27.25,11.225 27.25,10.05 27.8,9.5 C21.2@27.8,9.275 27.925,9.4 28.425,8.9 v1(28.75,8.9) ; C28.2@32.225,34.375 C28.2@32.2,34.375 ; v1(32.5,35.45) 32.5,34.775 32.15,34.425 C28.2@32.2,34.375 ; U6.52@33.75,11.225 33.75,10.075 34.3,9.525 C22.2@34.3,9.275 v1(34.3,7.925) 34.622,7.603 37.704,7.603 39.083,8.982 39.3,8.982 C23.2@39.3,9.275 v1(40.425,9.275) ; v1(38.3,35.55) 38.3,34.4 37.753,33.853 37.753,32.278 U6.121@37.75,32.275 37.75,31.556 36.644,30.45 33.856,30.45 32.75,31.556 U6.131@32.75,32.275 32.75,33.575 32.2,34.125 C28.2@32.2,34.375 ; U6.62@38.75,11.225 38.75,10.025 C23.2@39.3,9.475 ; v1(42.725,8.75) 43.4,8.75 C31.2@43.95,9.3 43.95,10.05 43.75,10.25 U6.72@43.75,11.225 ; U6.84@45.525,18.5 47.25,18.5 C24.2@47.8,19.05 v1(48.95,19.05) 49.5,18.5 C5.2@50.75,18.5 ; U6.95@45.525,24 46.244,24 C25.2@47.259,22.984 ; U6.108@45.525,30.5 46.55,30.5 47.75,31.7 47.675,31.775 v1(47.675,33.05) ; C25.2@47.375,23.1 47.633,23.1 48.41,23.877 49.54,23.877 49.713,23.704 51.479,23.704 v1(52.175,24.4) ; v3(50.2,3.375) 51.775,3.375 R17.2@51.8,3.4
  Bottom Layer w0.21: U2.29@21.175,11.9 C3.2@22.275,11.9 ; v2(22.275,13.15) C3.2@22.275,11.9 ; v2@24.375,10.05 23.2,10.05 23.1,9.95 22.85,9.95 22.85,11.325 C3.2@22.275,11.9
  Bottom Layer w0.254: R2.2@9.15,6.475 9.125,6.45 10.225,5.35 v2(10.225,4.6) ; v2(11.225,39.225) 13.1,39.225 R8.2@13.5,39.625 R7.2@15.95,39.625 ; U2.43@14.175,11.9 C2.2@14.175,10.075 14.2,10.1 v2(15.275,10.1) ; R7.2@16.125,39.65 16.125,40.925 v2(16.15,40.95) ; v2(23.025,23.075) 24.025,23.075 R19.2@26.5,25.55 ; v2(24.075,27.225) 25.004,27.225 28.508,30.729 29.254,30.729 C14.2@30.925,32.4 31.525,32.4 31.75,32.175 U5.27@32.55,32.175 ; v2@24.375,10.05 25.626,10.05 28.526,12.95 v2(28.925,12.95) 30.55,12.95 C12.2@30.575,12.975 U5.3@32.55,12.975 ; v2(24.475,17.65) 24.489,17.65 25.761,18.922 27.245,18.922 27.588,18.579 28.165,18.579 28.573,18.987 28.573,20.623 C15.2@30.225,22.275 ; v2(29.3,17.675) 30.125,17.675 C10.2@30.225,17.775 U5.9@32.55,17.775 ; C15.2@30.575,22.275 31.075,21.775 U5.14@32.55,21.775 ; v2(31.15,9.95) 31.15,10.925 C11.2@30.925,11.15 31.15,11.375 U5.1@32.55,11.375 ; U5.49@43.85,15.375 C9.2@45.9,15.375 v2(47.55,15.375) ; U5.43@43.85,20.175 C13.2@45.9,20.175 46,20.075 v2(47.325,20.075)
  other v1: 65,9 66,9 67,9 54,14 64,15 64,16 64,17
  other v2: 24.625,10.05
5V: 5V_TP.1 "5V Alt..1" C4.2 C8.2 C39.2 L1.1 LED4.2 R10.2 R18.2 R31.2 R32.2 R38.2 U3.5 U4.5 U7.6 U8.1 | length 26.1
  Top Layer w0.254: v3(41.075,7.55) 43.069,7.55 43.416,7.897 52.586,7.897 53.935,6.548 ; 5V_TP.1@51.6,6.075 52.073,6.548 53.935,6.548 ; R18.2@57.825,7.775 56.598,6.548 53.935,6.548 ; C39.2@59.45,26.275 C39.2@59.45,26.525
  Bottom Layer w0.254: LED4.2@39.525,7.95 39.925,7.55 v3(41.075,7.55) ; v2(57.175,10.325) 58.125,10.325 U3.5@58.25,10.2 57.968,9.917 57.968,7.8
  other v1: 59.8,7.1 60.7,7.1 3.85,11.2 4.775,11.2 55.75,26 55.3,26.9 56.2,26.9 58,26.9 57.55,27.8 58.45,27.8 8.95,29.6 9.4,30.5 2.825,30.925 3.752,30.925 9.85,31.4 10.75,31.4 10.3,32.3 11.2,32.3
  other v2: 56.275,5.225 53.075,5.25 54.125,5.25 55.2,5.25
5V_NOT-MONITORED: C38.2 J1.1 R26.2 R27.2 U7.1 | length 1.5
  Top Layer w0.254: J1.1@4.962,22.8 6.425,22.8
  other v1: 7.6,21.5 7.15,24.2 5.8,25.1 6.7,25.1 7.6,35.9 8.5,35.9 8.05,36.8 8.95,36.8 7.6,37.7 8.5,37.7
A0: U2.31 U5.23 U6.10 | length 55.5
  Top Layer w0.254: U6.10@24.475,26 25.619,26 26.745,27.126 v3(27.276,27.126)
  Signal Layer 1 w0.254: v2@6.401,21.376 6.575,21.202 6.575,17.038 9.021,14.592 14.556,14.592 16.498,12.65 19.296,12.65 20.173,13.527 ; 20.174,13.526 v2(21.076,13.526)
  Bottom Layer w0.254: v2(6.6,21.376) 6.603,21.373 14.398,21.373 17.275,24.25 23.175,24.25 26.051,27.126 v3(27.276,27.126) 29.2,29.05 32.475,29.05 U5.23@32.55,28.975 ; U2.31@20.175,11.9 20.175,12.723 v2@21.027,13.575
A1: U2.26 U5.24 U6.11 | length 36.6
  Top Layer w0.254: U6.11@24.475,25.5 25.775,25.5 26.704,26.429 v1(28.265,26.429)
  Signal Layer 1 w0.254: v2(21.55,25.95) 26.443,25.95 26.844,26.351 v1@28.265,26.351
  Bottom Layer w0.254: U2.26@20.175,31.1 20.175,30.222 21.55,28.847 21.55,27.35 ; v2(21.55,25.95) 21.55,27.35 ; U5.24@32.55,29.775 33.5,29.775 34.101,30.376 34.101,32.622 ; 34.099,32.623 33.081,33.641 27.412,33.641 21.55,27.779 21.55,27.35
A2: U2.25 U5.25 U6.12 | length 40.4
  Top Layer w0.254: U6.12@24.475,25 25.931,25 26.878,25.947 27.603,25.947 28.025,25.525 v1(28.776,25.526)
  Signal Layer 1 w0.254: v2(20.475,25.925) 21.147,25.253 21.839,25.253 21.99,25.404 26.468,25.404 27.011,25.947 27.761,25.947 27.976,25.732 28.57,25.732 v1(28.776,25.526)
  Bottom Layer w0.254: U2.25@19.675,31.1 19.675,29.625 20.475,28.825 v2(20.475,25.925) 20.589,25.925 21.261,25.253 21.839,25.253 22.247,25.661 22.247,27.905 27.579,33.237 32.828,33.237 33.637,32.428 33.637,31.122 33.09,30.575 U5.25@32.55,30.575
A3: U2.24 U5.26 U6.13 | length 33.4
  Top Layer w0.254: U6.13@24.475,24.5 26.087,24.5 26.837,25.25 v1(27.3,25.25)
  Signal Layer 1 w0.21: v1@27.05,25 v1(27.3,25.25)
  Signal Layer 1 w0.254: v2(19.4,25.925) 20.476,24.849 22.006,24.849 22.157,25 v1@27.05,25
  Bottom Layer w0.254: U2.24@19.175,31.1 19.175,26.15 v2(19.4,25.925) 20.671,24.654 23.004,24.654 28.675,30.325 30.96,30.325 32.01,31.375 U5.26@32.55,31.375
A4: U2.23 U5.29 U6.14 | length 48.5
  Top Layer w0.254: U6.14@24.475,24 27.601,24
  Signal Layer 1 w0.254: v2@18.057,25.807 18.175,25.925 v2(18.3,25.925) 18.094,25.719 18.094,24.627 18.671,24.05 22.443,24.05 22.569,24.176 26.595,24.176 26.721,24.05 27.6,24.05 v1(27.925,23.725)
  Bottom Layer w0.254: v2(18.3,25.925) 18.3,26.05 18.675,26.425 U2.23@18.675,31.1 18.675,31.978 19.164,32.467 25.667,32.467 27.245,34.045 40.08,34.045 42.75,31.375 U5.29@43.85,31.375
A5: U2.22 U5.30 U6.15 | length 52.5
  Top Layer w0.254: U6.15@24.475,23.5 26.727,23.5 v1(26.926,23.301)
  Signal Layer 1 w0.254: v2(17.25,25.925) 17.25,24.9 18.504,23.646 22.61,23.646 22.736,23.772 26.428,23.772 26.899,23.301 v1(26.926,23.301)
  Bottom Layer w0.254: v2@17.177,25.998 18.175,26.996 U2.22@18.175,31.1 18.175,32.135 18.911,32.871 25.499,32.871 27.077,34.449 44.151,34.449 44.937,33.663 44.937,31.122 44.39,30.575 U5.30@43.85,30.575
A6: U2.21 U5.31 U6.50 | length 69.8
  Top Layer w0.254: v1(31.952,19.801) 32.052,19.801 32.75,19.103 U6.50@32.75,11.225
  Signal Layer 1 w0.254: v2(16.025,24.15) 18.275,21.9 29.9,21.9 31.952,19.848 v1(31.952,19.801)
  Bottom Layer w0.254: v2(16.025,24.15) 16.133,24.258 16.133,25.878 17.675,27.421 U2.21@17.675,31.1 17.675,32.291 18.659,33.275 25.332,33.275 26.91,34.853 44.403,34.853 45.401,33.855 45.401,30.786 44.39,29.775 U5.31@43.85,29.775
A7: U2.20 U5.32 U6.53 | length 73.7
  Top Layer w0.254: v1(33.024,19.926) 33.214,19.736 33.214,13.064 34.25,12.028 U6.53@34.25,11.225
  Signal Layer 1 w0.254: v2(15.376,25.951) 15.376,25.174 15.703,24.847 16.314,24.847 18.857,22.304 30.646,22.304 v1(33.024,19.926)
  Bottom Layer w0.254: v2(15.376,25.951) 15.376,26.174 15.3,26.25 17.175,28.125 U2.20@17.175,31.1 17.175,32.447 18.407,33.679 25.165,33.679 26.743,35.257 44.655,35.257 45.865,34.047 45.865,30.449 44.39,28.975 U5.32@43.85,28.975
A8: U2.10 U5.33 U6.54 | length 54
  Top Layer w0.254: U6.54@34.75,11.225 34.75,12.185 33.781,13.154 33.781,22.856 34.825,23.9 v3(35.425,23.9)
  Signal Layer 1 w0.254: v2(14.325,26.05) 15.104,26.829 16.2,26.829 17.571,28.2 28.615,28.2 30.015,26.8 31.843,26.8 34.744,23.9 v3(35.425,23.9)
  Bottom Layer w0.254: U2.10@12.175,31.1 12.175,30.214 14.325,28.064 v2(14.325,26.05) ; v3(35.425,23.9) 36.894,23.9 41.169,28.175 U5.33@43.85,28.175
A9: U2.9 U5.34 U6.55 | length 57.2
  Top Layer w0.254: v3(35.075,21.825) 35,21.825 34.245,21.07 34.245,13.346 35.25,12.341 U6.55@35.25,11.225
  Signal Layer 1 w0.254: v2(13.275,26.05) 13.275,26.783 13.725,27.233 16.033,27.233 17.404,28.604 28.782,28.604 30.182,27.204 32.096,27.204 34.593,24.707 35.604,24.707 36.122,24.189 36.122,22.872 v3(35.075,21.825)
  Bottom Layer w0.254: U2.9@11.675,31.1 11.675,30.058 13.275,28.458 v2(13.275,26.05) ; v3(35.075,21.825) 35.257,22.007 35.657,22.007 41.025,27.375 U5.34@43.85,27.375
A10: U2.8 U5.22 U6.56 | length 48.1
  Top Layer w0.254: 35.677,20.151 35.677,18.768 34.709,17.8 34.709,13.538 35.75,12.497 U6.56@35.75,11.225
  Signal Layer 1 w0.254: v2(12.425,26.7) 12.425,26.897 13.225,27.697 15.925,27.697 17.311,29.083 28.875,29.083 30.056,27.901 v3(30.476,27.901) 32.192,27.901 34.923,25.171 35.711,25.171 36.526,24.356 36.526,22.62 35.939,22.033 35.939,20.889 v1(35.625,20.575)
  Bottom Layer w0.254: U2.8@11.175,31.1 11.175,29.902 12.425,28.652 v2(12.425,26.7) ; v3@30.475,28.175 U5.22@32.55,28.175
A11: U2.7 U5.35 U6.57 | length 56.7
  Top Layer w0.254: U6.57@36.25,11.225 36.25,12.653 35.173,13.73 35.173,17.608 36.775,19.21 36.775,21.1 v3(36.925,21.25)
  Signal Layer 1 w0.254: v2(11.475,27.45) 11.539,27.45 12.25,28.161 15.818,28.161 17.144,29.487 29.72,29.487 30.593,28.614 32.636,28.614 35.675,25.575 35.878,25.575 36.93,24.523 36.93,21.255 v3(36.925,21.25)
  Bottom Layer w0.254: U2.7@10.675,31.1 10.675,29.746 11.482,28.939 11.482,27.457 v2(11.475,27.45) ; v3(36.925,21.25) 36.925,22.6 40.9,26.575 U5.35@43.85,26.575
A12: U2.6 U5.36 U6.87 | length 50.9
  Top Layer w0.254: v3(40.427,20.851) 41.278,20 U6.87@45.525,20
  Signal Layer 1 w0.254: v2(10.725,28.625) 15.711,28.625 16.388,29.302 16.977,29.891 29.887,29.891 30.761,29.018 32.804,29.018 35.842,25.979 36.046,25.979 40.427,21.598 v3(40.427,20.851)
  Bottom Layer w0.254: U2.6@10.175,31.1 10.175,29.175 v2(10.725,28.625) ; v3(40.427,20.851) 40.427,25.402 41.075,26.05 43.035,26.05 43.31,25.775 U5.36@43.85,25.775
A13: U2.5 U6.88 | length 45.6
  Top Layer w0.254: v1(41.477,21.021) 41.998,20.5 U6.88@45.525,20.5
  Signal Layer 1 w0.254: v2(10.425,27.575) 10.425,27.854 9.968,28.311 9.968,28.854 10.496,29.382 13.869,29.382 14.844,30.357 29.993,30.357 30.928,29.422 32.978,29.422 36.017,26.383 36.213,26.383 41.477,21.119 v1(41.477,21.021)
  Bottom Layer w0.254: 9.675,28.5 U2.5@9.675,31.1 ; 9.676,28.501 10.425,27.751 v2(10.425,27.575)
A14: U2.4 U5.20 U6.89 | length 50.2
  Top Layer w0.254: v1(41.427,22.851) 41.427,22.142 41.462,22.107 41.961,21.608 42.569,21 U6.89@45.525,21
  Signal Layer 1 w0.254: v2(9.375,27.6) 9.375,27.846 9.337,27.885 9.337,28.794 10.389,29.846 13.677,29.846 14.652,30.821 30.1,30.821 31.095,29.826 33.524,29.826 35.5,27.85 40.499,22.851 v1(41.427,22.851)
  Bottom Layer w0.254: U2.4@9.175,31.1 9.175,27.8 v2(9.375,27.6) ; U5.20@32.225,26.575 U5.20@32.55,26.575 34.225,26.575 v2(35.575,27.925)
A15: U2.3 U5.21 U6.90 | length 55.7
  Top Layer w0.254: v1(42.425,22.325) 42.425,21.8 42.725,21.5 U6.90@45.525,21.5
  Signal Layer 1 w0.254: v2(8.4,28.126) 7.783,28.744 7.783,31.54 10.243,34 11.35,34 14.043,31.307 30.186,31.307 31.263,30.23 34.67,30.23 v2(35.275,29.625) 35.275,29.296 40.962,23.608 41.741,23.608 42.425,22.924 v1(42.425,22.325)
  Bottom Layer w0.254: v2(8.4,28.126) 8.4,28.4 8.675,28.675 U2.3@8.675,31.1 ; U5.21@32.1,27.375 U5.21@32.55,27.375 33.09,27.375 35.275,29.56 v2(35.275,29.625)
A16: U2.54 U6.80 | length 45.5
  Top Layer w0.254: v1(40.8,18.175) 41.05,18.175 42.725,16.5 U6.80@45.525,16.5
  Signal Layer 1 w0.254: v2(10.175,18.125) 12.392,20.342 15.339,20.342 15.652,20.029 23.104,20.029 24.1,21.025 28.825,21.025 31.175,18.675 40.3,18.675 v1(40.8,18.175)
  Bottom Layer w0.254: U2.54@8.675,11.9 8.675,16.625 v2(10.175,18.125)
A17: U2.19 U6.81 | length 47.1
  Top Layer w0.254: v1(42.325,17.925) 43.25,17 U6.81@45.525,17
  Signal Layer 1 w0.254: v2(17.575,35.175) 19.375,36.975 26.975,36.975 28.548,35.402 28.548,35.381 32.174,31.754 34.872,31.754 36.496,30.131 36.496,28.731 40.156,25.071 42.34,25.071 43.122,24.289 43.122,22.036 42.938,21.852 42.938,18.538 v1(42.325,17.925)
  Bottom Layer w0.254: U2.19@16.675,31.1 16.675,34.329 17.521,35.175 v2(17.575,35.175)
A18: U2.18 U6.82 | length 49.1
  Top Layer w0.254: v1(43.325,17.925) 43.75,17.5 U6.82@45.525,17.5 44.625,17.5
  Signal Layer 1 w0.254: v2(16.45,35.175) 16.504,35.175 18.708,37.379 28.542,37.379 28.952,36.969 28.952,35.548 32.282,32.218 35.065,32.218 36.96,30.323 36.96,28.923 40.408,25.475 42.507,25.475 43.526,24.456 43.526,21.869 43.342,21.685 43.342,17.942 v1(43.325,17.925)
  Bottom Layer w0.254: U2.18@16.175,31.1 16.175,34.9 v2(16.45,35.175)
A19: U2.11 U6.2 | length 24.4
  Top Layer w0.254: v3(19.526,34.752) 22.5,31.775 22.5,31.221 23.721,30 U6.2@24.475,30
  Bottom Layer w0.254: U2.11@12.675,31.1 12.675,31.978 12.667,31.986 12.637,31.986 12.637,32.016 11.375,33.278 11.375,36.502 12.448,37.575 19.077,37.575 19.525,37.127 19.525,34.916 v3@19.689,34.752
A20: U2.12 U6.3 | length 18.8
  Top Layer w0.254: v3(14.25,34.6) 18.625,34.6 18.769,34.456 18.769,34.438 19.212,33.995 19.63,33.995 22.025,31.6 22.025,31.125 23.65,29.5 U6.3@24.475,29.5
  Bottom Layer w0.254: 13.177,32.132 13.177,31.102 U2.12@13.175,31.1 13.175,32.329 12.593,32.911 12.593,34.104 13.089,34.6 v3(14.25,34.6)
A21: U2.15 U6.4 | length 11.2
  Top Layer w0.254: v3(15.7,29.6) 22.213,29.6 22.813,29 U6.4@24.475,29
  Bottom Layer w0.254: U2.15@14.675,31.1 14.675,30.15 15.225,29.6 v3(15.7,29.6)
A22: U2.2 U6.5 | length 29.9
  Top Layer w0.254: v1(24.075,32.7) 24.075,32.175 25.925,30.325 25.925,28.944 25.481,28.5 U6.5@24.475,28.5
  Signal Layer 1 w0.254: v2(20.6,34.975) 22.875,32.7 v1(24.075,32.7)
  Bottom Layer w0.254: U2.2@8.175,31.1 8.175,33.875 12.424,38.124 19.301,38.124 20.35,37.075 20.35,35.225 v2(20.6,34.975)
A23: U2.1 U6.1 | length 27.3
  Top Layer w0.254: v3@21.076,36.12 v3(21.175,36.12) 21.175,35.471 23.3,33.346 23.3,31.012 23.812,30.5 U6.1@24.475,30.5
  Bottom Layer w0.254: U2.1@7.675,31.1 7.675,34 12.263,38.588 19.493,38.588 21.175,36.906 v3(21.175,36.12)
B2: U1.23 U6.122 | length 48
  Top Layer w0.254: U1.23@36.495,5.796 36.495,2.98 v1(36.55,2.925) ; U6.122@37.25,32.275 37.25,33.139 37.349,33.238 37.349,34.951 v1(37.3,35)
  Signal Layer 1 w0.21: v1(36.55,2.925) 36.55,4.401 37.325,5.176
  Signal Layer 1 w0.254: v1(37.3,35) 40.673,31.627 41.469,31.627 42.097,30.999 42.097,30.989 42.337,30.748 42.341,30.748 45.167,27.922 45.167,26.908 46.15,25.925 46.15,22.728 45.82,22.398 45.82,19.452 45.992,19.28 45.992,10.442 41.575,6.025 38.174,6.025 37.325,5.176
B3: U1.24 U6.126 | length 50.1
  Top Layer w0.254: U6.126@35.25,32.275 v1@35.25,34.6 ; v1(35.275,2.75) 35.797,2.228 36.839,2.228 37.247,2.636 37.247,3.214 37.003,3.458 U1.24@37.003,5.796
  Signal Layer 1 w0.21: v1(35.275,2.75) 35.525,3 35.525,4.375 38.025,6.875 39.4,6.875
  Signal Layer 1 w0.254: v1(35.252,34.602) 35.63,34.224 36.94,34.224 37.349,33.815 37.349,32.901 45.3,24.95 45.3,23.175 45.066,22.941 45.066,19.084 45.25,18.9 45.25,12.325 41.172,8.247 40.772,8.247 39.4,6.875
B4: U1.25 U6.127 | length 55.2
  Top Layer w0.254: U6.127@34.75,32.275 34.75,33.847 34.555,34.042 34.555,35.655 34.852,35.952 v1(34.852,36.077) ; U1.25@37.511,5.796 37.511,4.314 v1(37.75,4.075)
  Signal Layer 1 w0.254: v1(34.852,36.077) 35.116,36.077 36.412,37.373 41.103,37.373 45.975,32.501 45.975,27.243 47,26.218 47,22.436 46.628,22.064 46.628,19.786 46.8,19.614 46.8,8.141 43.834,5.175 38.85,5.175 v1(37.75,4.075)
B5: U1.26 U6.37 | length 28.6
  Top Layer w0.21: U1.26@37.975,5.778 U1.26@37.993,5.796 37.993,4.907 38.425,4.475 38.425,3.795 38.127,3.497 v3(38.127,2.95)
  Top Layer w0.254: v3(22.2,4.5) 22.2,5.063 23.479,6.342 23.479,7.616 25.381,9.518 25.381,9.798 26.25,10.667 U6.37@26.25,11.225
  Bottom Layer w0.21: v3(22.2,4.5) 24.358,2.342 29.816,2.342 29.819,2.345 37.522,2.345 v3(38.127,2.95)